# Altium PCB foc.PcbDoc
Units mm, origin at the board's own origin, x right, y up, seen from the top; angles counter-clockwise.
Board outline 89.54 x 51.18 mm, 2 copper layers (Top Layer, Bottom Layer); 143 components, 82 nets, 471 pads, 233 vias.
Unrouted connection lines stored in the file: 246.
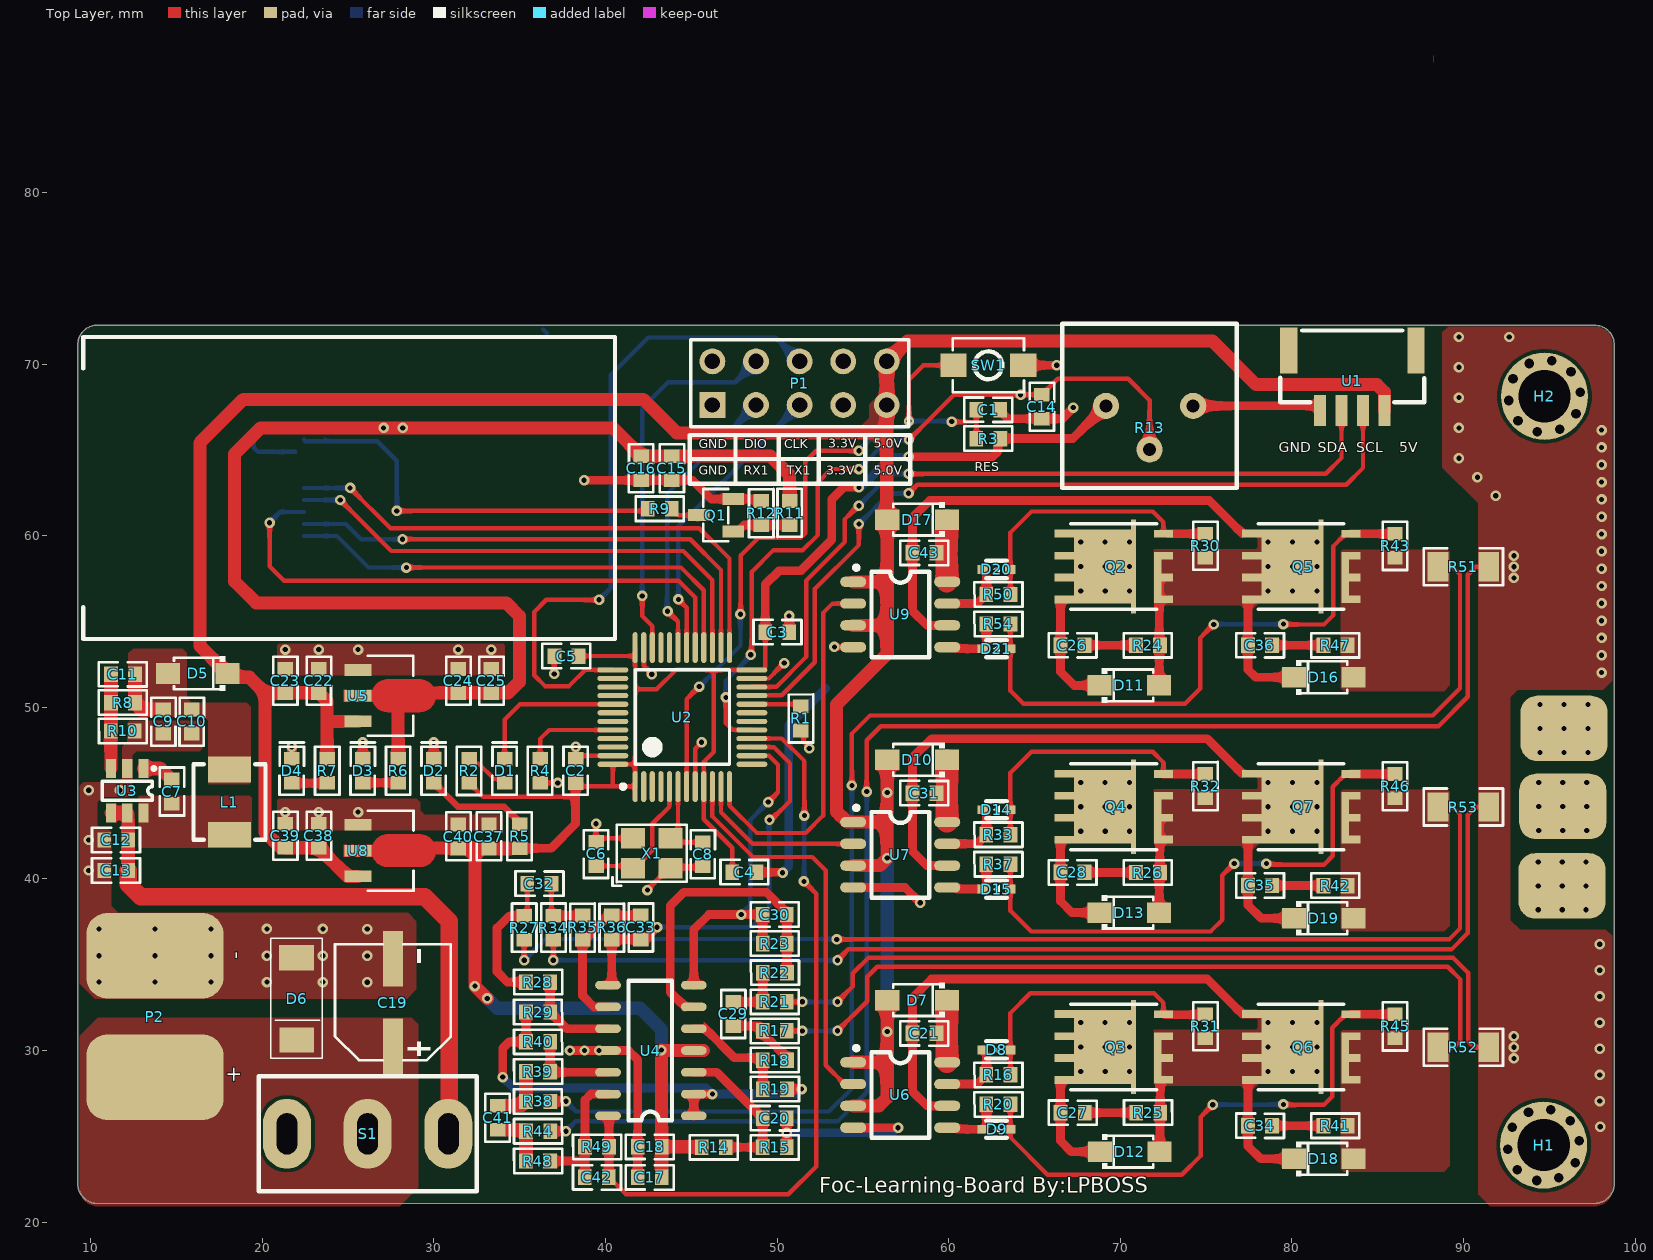
[diagram p0: Top Layer view]
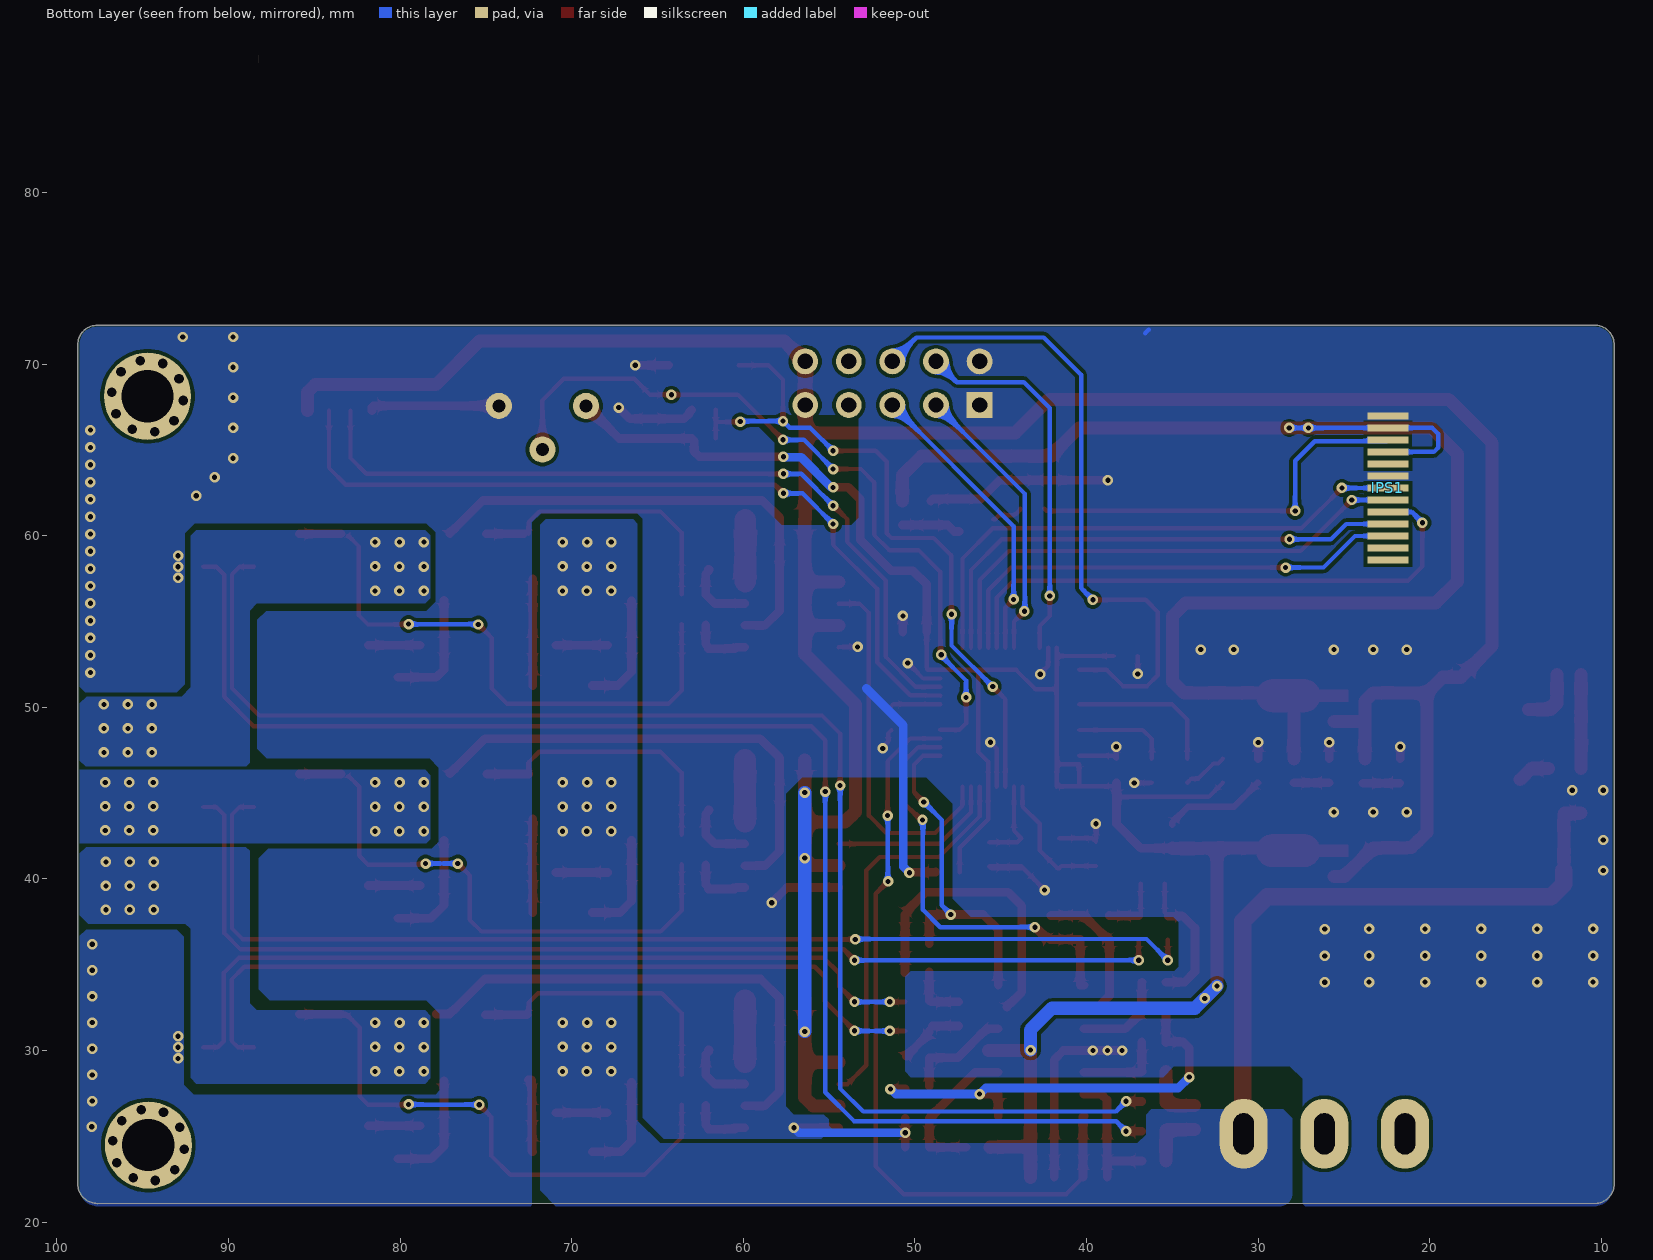
[diagram p1: Bottom Layer view, seen from below]

## Layer stack, top to bottom
Top Solder: solder mask 0.0102, Solder Resist, Dk 3.5
Top Layer: signal copper 0.0356
Dielectric 1: dielectric 0.32, FR-4, Dk 4.8
Bottom Layer: signal copper 0.0356
Bottom Solder: solder mask 0.0102, Solder Resist, Dk 3.5

## Board outline
10.239,21.092 cw(c10.39,22.226) 9.245,22.226 9.245,22.227 9.245,71.102 9.244,71.12 cw(c10.389,71.12) 10.389,72.265 10.406,72.263 97.635,72.263 97.636,72.263 cw(c97.636,71.119) 98.781,71.12 98.781,71.119 98.781,22.228 98.781,22.226 cw(c97.636,22.226) 97.636,21.082

## Design rules (kind name [scope] priority, off if disabled: settings)
Clearance [All] p1: gap=0.203 ignorepadtopadclearanceinfootprint=TRUE
ComponentClearance [All] p1: gap=0 collisioncheckmode=3 verticalgap=0 showdistances=FALSE
PlaneConnect [All] p1: planeconnectstyle=Direct reliefexpansion=0.508 reliefentries=4 reliefconductorwidth=0.254 reliefairgap=0.254
PolygonConnect [All] p1: connectstyle=Direct reliefconductorwidth=0.254 reliefentries=4 polygonreliefangle="90 Angle" airgapwidth=0.254
RoutingVias [All] p1: holewidth=0.711 width=1.27 viastyle="Through Hole" minholewidth=0.025 minwidth=0.025 maxholewidth=0.711 maxwidth=1.27
SolderMaskExpansion [All] p1: expansion=0.102 istentingtop=FALSE
Width [All] p1: maxlimit=2.54 minlimit=0.025 preferedwidth=0.254
28 further rules are at their usual default settings.

## Components (designator, comment, footprint, x,y, rotation, side; value= is the part's Value field where it differs from the comment)
C1 "104" C0603 62.306,67.335 r0 top
C2 "104" C0603 38.252,46.289 r270 top
C3 "104" C0603 50.013,54.381 r180 top
C4 "104" C0603 48.087,40.395 r180 top
C5 "104" C0603 37.719,52.984 r0 top
C6 "20P" C0603 39.446,41.453 r90 top
C7 "104" C0603 14.732,45.085 r270 top
C8 "20P" C0603 45.665,41.433 r270 top
C9 "22UF" C0603 14.238,49.171 r90 top
C10 "104" C0603 15.889,49.171 r90 top
C11 "220pf" C0603 11.877,51.919 r0 top
C12 "104" C0603 11.481,42.266 r0 top
C13 "22uf" C0603 11.481,40.488 r0 top
C14 "104" C0603 65.43,67.513 r90 top
C15 "10uf" C0603 43.866,63.935 r90 top
C16 "104" C0603 42.078,63.935 r90 top
C17 "10uF" C0603 42.569,22.608 r180 top
C18 "104" C0603 42.569,24.383 r180 top
C19 "470uf" CAP-SMD_BD6.3-L6.6-W6.6-LS7.2-R-RD 27.61,32.791 r270 top
C20 "104" C0603 49.86,26.055 r180 top
C21 "104" C0603 58.582,30.995 r0 top
C22 "10uf" C0603 23.292,51.536 r270 top
C23 "104" C0603 21.336,51.536 r270 top
C24 "10uf" C0603 31.42,51.536 r270 top
C25 "104" C0603 33.351,51.536 r270 top
C26 "104" C0603 67.208,53.614 r180 top
C27 "104" C0603 67.219,26.376 r180 top
C28 "104" C0603 67.208,40.376 r180 top
C29 "104" C0603 47.447,32.131 r90 top
C30 "104" C0603 49.86,37.922 r0 top
C31 "1uf" C0603 58.582,44.995 r0 top
C32 "104" C0603 36.144,39.726 r180 top
C33 "104" C0603 42.062,37.173 r90 top
C34 "104" C0603 78.133,25.614 r180 top
C35 "104" C0603 78.133,39.614 r180 top
C36 "104" C0603 78.133,53.614 r180 top
C37 "104" C0603 33.208,42.468 r270 top
C38 "104" C0603 23.297,42.507 r270 top
C39 "10uf" C0603 21.342,42.507 r270 top
C40 "10uf" C0603 31.425,42.468 r270 top
C41 "104" C0603 33.706,26.086 r90 top
C42 "104" C0603 39.494,22.608 r180 top
C43 "104" C0603 58.582,58.995 r0 top
D1 "LED" LED0603 34.123,46.304 r90 top
D2 "LED" LED0603 29.987,46.304 r90 top
D3 "LED" LED0603 25.852,46.304 r90 top
D4 "LED" LED0603 21.717,46.304 r90 top
D5 "Diode" SOD-123FL_L2.7-W1.8-LS3.8-RD 16.231,51.968 r180 top
D6 "TVS-7.4/12V" SMA 22.996,36.145 r270 top
D7 "Diode" SOD-123FL_L2.7-W1.8-LS3.8-RD 58.152,32.933 r180 top
D8 "Diode" ESC_L1.2-W0.8-LS1.6-RD 62.778,30.029 r0 top
D9 "Diode" ESC_L1.2-W0.8-LS1.6-RD 62.788,25.407 r0 top
D10 "Diode" SOD-123FL_L2.7-W1.8-LS3.8-RD 58.152,46.933 r180 top
D11 "Diode" SOD-123FL_L2.7-W1.8-LS3.8-RD 70.53,51.272 r0 top
D12 "Diode" SOD-123FL_L2.7-W1.8-LS3.8-RD 70.541,24.105 r0 top
D13 "Diode" SOD-123FL_L2.7-W1.8-LS3.8-RD 70.53,38.034 r0 top
D14 "Diode" ESC_L1.2-W0.8-LS1.6-RD 62.778,44.029 r0 top
D15 "Diode" ESC_L1.2-W0.8-LS1.6-RD 62.778,39.407 r0 top
D16 "Diode" SOD-123FL_L2.7-W1.8-LS3.8-RD 81.849,51.745 r0 top
D17 "Diode" SOD-123FL_L2.7-W1.8-LS3.8-RD 58.152,60.933 r180 top
D18 "Diode" SOD-123FL_L2.7-W1.8-LS3.8-RD 81.849,23.683 r0 top
D19 "Diode" SOD-123FL_L2.7-W1.8-LS3.8-RD 81.849,37.704 r0 top
D20 "Diode" ESC_L1.2-W0.8-LS1.6-RD 62.778,58.029 r0 top
D21 "Diode" ESC_L1.2-W0.8-LS1.6-RD 62.778,53.407 r0 top
H1 "Hole" 铜柱孔3 94.666,24.486 r0 top
H2 "Hole" 铜柱孔3 94.717,68.123 r0 top
IPS1 "IPS1.14" IPS 15.661,62.781 r0 top locked
L1 "3.3uH" "0402 TPC 4*4*2" 18.085,44.475 r270 top
P1 "Header 5X2" HDR2X5 46.228,67.615 r0 top
P2 "电源" POWER 13.741,31.979 r90 top
Q1 "44H11" SOT-23-3_L2.9-W1.3-P1.90-LS2.4-BR 46.431,61.19 r0 top
Q2 "N-MOS" TDSON-8 69.609,58.201 r90 top
Q3 "N-MOS" TDSON-8 69.609,30.201 r90 top
Q4 "N-MOS" TDSON-8 69.609,44.201 r90 top
Q5 "N-MOS" TDSON-8 80.534,58.201 r90 top
Q6 "N-MOS" TDSON-8 80.534,30.201 r90 top
Q7 "N-MOS" TDSON-8 80.534,44.201 r90 top
R1 "10K" R0603 51.384,49.352 r90 top
R2 "10K" R0603 32.05,46.296 r90 top
R3 "10K" R0603 62.298,65.659 r180 top
R4 "10K" R0603 36.185,46.296 r270 top
R5 "10K" R0603 34.996,42.483 r90 top
R6 "10K" R0603 27.914,46.296 r270 top
R7 "10K" R0603 23.779,46.296 r270 top
R8 "73.2K" R0603 11.877,50.265 r0 top
R9 "24R" R0603 43.154,61.57 r180 top
R10 "10K" R0603 11.869,48.617 r180 top
R11 "1k" R0603 50.728,61.32 r270 top
R12 "10k" R0603 49.077,61.32 r90 top
R13 "WH160-1-503(B50K)" 滑动变阻器 71.704,66.294 r0 top
R14 "5.1K" R0603 46.304,24.359 r180 top
R15 "5.1K" R0603 49.86,24.359 r180 top
R16 "10" R0603 62.892,28.573 r180 top
R17 "1K" R0603 49.86,31.138 r0 top
R18 "1K" R0603 49.869,29.442 r0 top
R19 "15K" R0603 49.869,27.751 r180 top
R20 "10" R0603 62.892,26.854 r180 top
R21 "1K" R0603 49.86,32.834 r0 top
R22 "1K" R0603 49.869,34.535 r180 top
R23 "15K" R0603 49.86,36.226 r0 top
R24 "10" R0603 71.608,53.608 r0 top
R25 "10" R0603 71.619,26.376 r0 top
R26 "10" R0603 71.608,40.37 r0 top
R27 "1K" R0603 35.259,37.157 r270 top
R28 "1K" R0603 36.062,33.984 r180 top
R29 "15K" R0603 36.071,32.24 r0 top
R30 "10K" R0603 74.957,59.411 r90 top
R31 "10K" R0603 74.957,31.411 r90 top
R32 "10K" R0603 74.957,45.411 r90 top
R33 "10" R0603 62.892,42.573 r180 top
R34 "1K" R0603 36.958,37.157 r270 top
R35 "1K" R0603 38.663,37.166 r90 top
R36 "15K" R0603 40.363,37.166 r90 top
R37 "10" R0603 62.892,40.854 r180 top
R38 "1K" R0603 36.071,27.027 r0 top
R39 "1K" R0603 36.062,28.77 r180 top
R40 "15K" R0603 36.071,30.503 r0 top
R41 "10" R0603 82.533,25.608 r0 top
R42 "10" R0603 82.533,39.608 r0 top
R43 "10K" R0603 86.006,59.406 r90 top
R44 "1K" R0603 36.071,25.29 r0 top
R45 "10K" R0603 86.006,31.406 r90 top
R46 "10K" R0603 86.006,45.406 r90 top
R47 "10" R0603 82.533,53.608 r0 top
R48 "1K" R0603 36.062,23.557 r180 top
R49 "15K" R0603 39.501,24.383 r180 top
R50 "10" R0603 62.892,56.573 r180 top
R51 "20mR" R1206 89.989,58.186 r180 top
R52 "20mR" R1206 89.989,30.186 r180 top
R53 "20mR" R1206 89.989,44.186 r180 top
R54 "10" R0603 62.892,54.854 r180 top
S1 "MTS-10x" SW-TH_HOOYA_SS-12D10G4 26.137,25.146 r180 top
SW1 "Switch" SW-SMD_L4.0-W2.9-LS5.0 62.306,69.926 r180 top
U1 "GH125-4P" CONN-SMD_4P-P1.27_GH125-S04DCA-00 83.515,69.037 r180 top
U2 "STM32F103C8T6" 48P 44.475,49.428 r90 top
U3 "RY8121" SOT-23-6 12.127,45.131 r270 top
U4 "MCP6024" SOP14_L 42.647,29.997 r180 top
U5 "AMS1117" SOT-89_L4.5-W2.5-P1.50-LS4.2-BR 26.932,50.672 r180 top
U6 "EG2104" SOP-8 57.172,27.407 r270 top
U7 "EG2104" SOP-8 57.172,41.407 r270 top
U8 "AMS1117" SOT-89_L4.5-W2.5-P1.50-LS4.2-BR 26.938,41.643 r180 top
U9 "EG2104" SOP-8 57.172,55.407 r270 top
X1 "XTAL-4" OSC-SMD_4P-L3.2-W2.5-BL 42.693,41.498 r0 top

## Footprints (in the part's own frame and the unit in brackets; to place one, negate y for a bottom-side part, rotate by r counter-clockwise, add the part's x,y. Pads: shape width x height; smd on the part's side, far side on the other; paste and mask are expansions set on the pad)
48P [mm] "stm32f103"
  oval 1.8x0.3 smd: 1(-4.05,2.75) 2(-4.05,2.25) 3(-4.05,1.75) 4(-4.05,1.25) 5(-4.05,0.75) 6(-4.05,0.25) 7(-4.05,-0.25) 8(-4.05,-0.75) 9(-4.05,-1.25) 10(-4.05,-1.75) 11(-4.05,-2.25) 12(-4.05,-2.75) 25(4.05,-2.75) 26(4.05,-2.25) 27(4.05,-1.75) 28(4.05,-1.25) 29(4.05,-0.75) 30(4.05,-0.25) 31(4.05,0.25) 32(4.05,0.75) 33(4.05,1.25) 34(4.05,1.75) 35(4.05,2.25) 36(4.05,2.75)
  oval 0.3x1.8 smd: 13(-2.75,-4.05) 14(-2.25,-4.05) 15(-1.75,-4.05) 16(-1.25,-4.05) 17(-0.75,-4.05) 18(-0.25,-4.05) 19(0.25,-4.05) 20(0.75,-4.05) 21(1.25,-4.05) 22(1.75,-4.05) 23(2.25,-4.05) 24(2.75,-4.05) 37(2.75,4.05) 38(2.25,4.05) 39(1.75,4.05) 40(1.25,4.05) 41(0.75,4.05) 42(0.25,4.05) 43(-0.25,4.05) 44(-0.75,4.05) 45(-1.25,4.05) 46(-1.75,4.05) 47(-2.25,4.05) 48(-2.75,4.05)
  silkscreen extent -4.17,-2.75 2.75,3.57
"0402 TPC 4*4*2" [mm] "4.2mm x 4.4mm x 2mm 一体成型功率电感"
  rect 1.5x2.5 smd: 1(-1.9,0) 2(1.9,0)
  silkscreen extent -2.2,-2.1 2.2,2.1
C0603 [mm]
  rect 0.8x0.9 smd mask+0.051: 1(-0.7,0) 2(0.7,0)
  silkscreen extent -1.41,-0.71 1.39,0.72
CAP-SMD_BD6.3-L6.6-W6.6-LS7.2-R-RD [mm]
  rect 3.26x1.15 smd mask+0.051: 1(2.555,0) 2(-2.555,0)
  silkscreen extent -3.39,-3.38 3.36,3.38
CONN-SMD_4P-P1.27_GH125-S04DCA-00 [mm] "P4"
  rect 0.7x1.8 smd mask+0.05: 1(-1.875,1.75) 2(-0.625,1.75) 3(0.625,1.75) 4(1.875,1.75)
  rect 1x2.7 smd mask+0.05: 5(3.705,-1.75) 6(-3.705,-1.75)
  silkscreen extent -4.19,-2.92 4.19,1.27
ESC_L1.2-W0.8-LS1.6-RD [mil]
  rect 23.6x19.7 smd mask+2: 1(-31.5,0) 2(31.5,0)
  silkscreen extent -24,-20 24,20
HDR2X5 [mm] "Connector; Header; 5x2 Position"
  rect 1.5x1.5 hole 0.9: 1(0,0)
  round 1.5 hole 0.9: 2(0,2.54) 3(2.54,0) 4(2.54,2.54) 5(5.08,0) 6(5.08,2.54) 7(7.62,0) 8(7.62,2.54) 9(10.16,0) 10(10.16,2.54)
  silkscreen extent -1.27,-1.27 11.43,3.81
IPS [mm]
  rect 2.4x0.4 smd far side: 1(6.767,-4.2) 2(6.767,-3.5) 3(6.767,-2.8) 4(6.767,-2.1) 5(6.767,-1.4) 6(6.767,-0.7) 7(6.767,0) 8(6.767,0.7) 9(6.767,1.4) 10(6.767,2.1) 11(6.767,2.8) 12(6.767,3.5) 13(6.767,4.2)
  silkscreen extent -6.11,-8.8 24.89,8.8
LED0603 [mm]
  rect 0.8x0.9 smd mask+0.051: A(-0.7,0) N(0.7,0)
  silkscreen extent -1.41,-0.71 1.64,0.72
OSC-SMD_4P-L3.2-W2.5-BL [mm] "贴片晶振"
  rect 1.4x1.2 smd: 1(-1.1,-0.875) 2(1.1,-0.875) 3(1.1,0.875) 4(-1.1,0.875)
  silkscreen extent -2.29,-1.9 2.03,1.65
POWER [mm]
  rrect50% 5x8 smd: 1(-3.541,-0.001) 2(3.541,0.001)
R0603 [mm]
  rect 0.8x0.9 smd mask+0.051: 1(-0.7,0) 2(0.7,0)
  silkscreen extent -1.41,-0.71 1.4,0.72
R1206 [mm]
  rect 1.208x1.701 smd paste-100 mask+0.051: 1(-1.479,0) 2(1.479,0)
  silkscreen extent -2.31,-1.08 2.31,1.08
SMA [mm]
  rect 1.47x2.02 smd: A(0.74,-1.01) N(5.53,-1)
  silkscreen extent -0.4,-2.5 6.6,0.5
SOD-123FL_L2.7-W1.8-LS3.8-RD [mm]
  rect 1.4x1.2 smd: 1(-1.735,0) 2(1.735,0)
  silkscreen extent -1.6,-1 1.38,1
SOP14_L [mm] "8.7*6.2*1.8mm（长宽高）"
  oval 1.5x0.5 smd: 1(-2.5,3.81) 2(-2.5,2.54) 3(-2.5,1.27) 4(-2.5,0) 5(-2.5,-1.27) 6(-2.5,-2.54) 7(-2.5,-3.81) 8(2.5,-3.81) 9(2.5,-2.54) 10(2.5,-1.27) 11(2.5,0) 12(2.5,1.27) 13(2.5,2.54) 14(2.5,3.81)
  silkscreen extent -1.23,-4.06 1.31,4.06
SOP-8 [mm]
  oval 0.6x1.52 smd mask+0.051: 1(-1.905,-2.74) 2(-0.635,-2.74) 3(0.635,-2.74) 4(1.905,-2.74) 5(1.905,2.74) 6(0.635,2.74) 7(-0.635,2.74) 8(-1.905,2.74)
  silkscreen extent -2.85,-2.68 2.5,1.7
SOT-23-3_L2.9-W1.3-P1.90-LS2.4-BR [mm]
  rect 1.25x0.7 smd mask+0.051: 1(1,-0.95) 2(1,0.95) 3(-1,0)
  silkscreen extent -0.73,-1.53 0.73,1.53
SOT-23-6 [mm] "SOT23, 6-Leads, Body 2.90x2.80mm, Pitch 0.95mm, IPC Medium Density"
  rect 1.1x0.6 smd: 1(-1.3,0.95) 2(-1.3,0) 3(-1.3,-0.95) 4(1.3,-0.95) 5(1.3,0) 6(1.3,0.95)
  silkscreen extent -1.37,-1.45 0.55,1.63
SOT-89_L4.5-W2.5-P1.50-LS4.2-BR [mm]
  rect 1.575x0.672 smd paste+0 mask+0.051: 1(1.356,-1.5) 2(1.356,0) 3(1.356,1.5)
  Top Layer region: -2.233,0.95 -0.378,0.95 -0.334,0.949 -0.289,0.946 -0.245,0.94 -0.201,0.933 -0.158,0.924 -0.115,0.912 -0.072,0.899 -0.03,0.884 0.011,0.866 0.051,0.847 0.09,0.826 0.128,0.803 0.166,0.779 0.201,0.752 0.236,0.724 0.269,0.695 0.301,0.664 0.332,0.631 0.36,0.597 0.388,0.562 0.413,0.525 0.437,0.488 0.459,0.449 0.479,0.409 0.491,0.356 2.195,0.356 2.195,-0.356 0.491,-0.356 0.479,-0.41 0.459,-0.449 0.437,-0.488 0.413,-0.526 0.388,-0.562 0.36,-0.598 0.332,-0.631 0.301,-0.664 0.269,-0.695 0.236,-0.725 0.201,-0.753 0.166,-0.779 0.128,-0.804 0.09,-0.827 0.051,-0.848 0.011,-0.867 -0.03,-0.884 -0.072,-0.9 -0.115,-0.913 -0.158,-0.924 -0.201,-0.934 -0.245,-0.941 -0.289,-0.946 -0.334,-0.949 -0.378,-0.95 -2.233,-0.95 -2.277,-0.949 -2.321,-0.946 -2.366,-0.941 -2.41,-0.934 -2.453,-0.924 -2.496,-0.913 -2.539,-0.9 -2.581,-0.884 -2.622,-0.867 -2.662,-0.848 -2.701,-0.827 -2.739,-0.804 -2.776,-0.779 -2.812,-0.753 -2.847,-0.725 -2.88,-0.695 -2.912,-0.664 -2.942,-0.631 -2.971,-0.598 -2.998,-0.562 -3.024,-0.526 -3.048,-0.488 -3.07,-0.449 -3.09,-0.41 -3.108,-0.369 -3.124,-0.327 -3.139,-0.285 -3.151,-0.243 -3.161,-0.199 -3.17,-0.155 -3.176,-0.111 -3.18,-0.067 -3.182,-0.023 -3.182,0.022 -3.18,0.067 -3.176,0.111 -3.17,0.155 -3.161,0.199 -3.151,0.242 -3.139,0.285 -3.124,0.327 -3.108,0.368 -3.09,0.409 -3.07,0.449 -3.048,0.488 -3.024,0.525 -2.998,0.562 -2.971,0.597 -2.942,0.631 -2.912,0.664 -2.88,0.695 -2.847,0.724 -2.812,0.752 -2.776,0.779 -2.739,0.803 -2.701,0.826 -2.662,0.847 -2.622,0.866 -2.581,0.884 -2.539,0.899 -2.496,0.912 -2.453,0.924 -2.41,0.933 -2.366,0.94 -2.321,0.946 -2.277,0.949
  silkscreen extent -1.87,-2.33 0.78,2.33
SW-SMD_L4.0-W2.9-LS5.0 [mm]
  rect 1.53x1.36 smd mask+0.051: 1(-2.035,0) 2(2.035,0)
  silkscreen extent -2.08,-1.58 2.08,1.58
SW-TH_HOOYA_SS-12D10G4 [mil] "拨动开关"
  oval 110x160 hole 47.24 slot 94.49 at 90 deg: 1(-185.04,0) 2(0,0) 3(185.04,0)
  silkscreen extent -250,-132 250,132
TDSON-8 [mm]
  rect 0.45x1.6 smd: 1(-1.925,2.65) 1(-0.635,2.65) 1(0.635,2.65) 1(1.925,2.65)
  rect 5.5x0.3 smd: 1(0,-1.158)
  rect 4.3x3.605 smd: 1(0,0.495)
  rect 0.45x1.1 smd: 2(1.905,-2.9) 3(-1.905,-2.9) 3(-0.635,-2.9) 3(0.635,-2.9)
  rect 2.99x0.45 smd: 3(-0.635,-2.575)
  silkscreen extent -2.5,-2.5 2.5,2.5
滑动变阻器 [mil]
  round 60 hole 30: 1(-100,50) 2(0,-50) 3(100,50)
  silkscreen extent -200,-139 200,239
铜柱孔3 [mil]
  round 23 hole 22: 11(-82.21,-9.67) 11(-72.19,40.5) 11(-60.83,-56.14) 11(-34.6,75.2) 11(-16.21,-81.17) 11(16.21,81.17) 11(34.6,-75.2) 11(60.83,56.14) 11(72.19,-40.5) 11(82.21,9.67)
  round 200 hole 120: 11(0,0)

## Part data
C1 C2 C3 C4 C5 C6 C7 C8 C9 C10 C11 C12 C13 C14 C15 C16 C17 C18 C20 C21 C22 C23 C24 C25 C26 C27 C28 C29 C30 C31 C32 C33 C34 C35 C36 C37 C38 C39 C40 C41 C42 C43: library part C, "无极性电容", BOM名称=无极性贴片电容, 学习资源=www.ooocke.com, 版权归属=源创客
C19: library part CAP+, "电解电容 10uf  贴片型 钽电容的正极是实物有线的一段", BOM_JLCPCB Part Class="Extended Part", BOM_Manufacturer=ROQANG, BOM_Manufacturer Part=RVT1V100M0405, BOM_Supplier=LCSC, BOM_Supplier Part=C72485, nameAlias=Capacitance, spicePre=C, spiceSymbolName=RVT1V100M0405-C72485
D5 D7 D8 D9 D10 D11 D12 D13 D14 D15 D16 D17 D18 D19 D20 D21: library part 二极管, "Diode 1N series"
H1 H2: "电机的洞"
L1: library part L, "电感", BOM名称=小功率贴片电感, 学习资源=www.ooocke.com, 版权归属=源创客
P1: "Header, 5-Pin, Dual row", LatestRevisionDate=17-Jul-2002, LatestRevisionNote="Re-released for DXP Platform.", Publisher="Altium Limited"
P2: library part power
Q1: library part NPN, "NPN型", BOM名称=互补功率-NPN型, 学习资源=www.ooocke.com, 属性="80V 8A 50W", 版权归属=源创客
Q2 Q3 Q4 Q5 Q6 Q7: "N沟场效应管", BOM名称=N沟场效应管, 学习资源=www.ooocke.com, 版权归属=源创客
R1 R2 R3 R4 R5 R6 R7 R8 R9 R10 R11 R12 R14 R15 R16 R17 R18 R19 R20 R21 R22 R23 R24 R25 R26 R27 R28 R29 R30 R31 R32 R33 R34 R35 R36 R37 R38 R39 R40 R41 R42 R43 R44 R45 R46 R47 R48 R49 R50 R51 R52 R53 R54: library part R, "电阻", BOM名称=贴片电阻, 学习资源=www.ooocke.com, 版权归属=源创客
R13: "拨码开关", Manufacturer=JML, Manufacturer Part=WH160-1-503(B50K), nameAlias=Value, spicePre=R, spiceSymbolName=B503，可变电阻, Supplier=LCSC, Supplier Part=C52954
S1: "MTS10x系列3脚扭子开关", BOM名称=MTS10x系列3脚扭子开关, 学习资源=www.ooocke.com, 版权归属=源创客
SW1: "SWITCH"
U3: "18V 2A 1MHz Synchronous Step-Down Regulator"
X1: "贴片晶振"

## Free pads (board coordinates)
  rrect50% 5.08x3.81 smd mask+0.051: 7(95.746,39.591) 7(95.783,44.221) 7(95.86,48.768)

## Via types
v1: diameter 0.61, hole 0.305, Top Layer to Bottom Layer, tented both sides, 233 vias

## Nets (pads, with @x,y where several pads share a name; then routed paths per layer and width w, separated by ;. In a path a pad name is that pad's centre, name@x,y a point inside that pad or via, vN(x,y) a via of type N, cw(c..) or ccw(c..) an arc to the next point about the centre after c; other vN are vias at no path point)
1.65V: R19.1 R29.1 R40.1 U4.1 U4.2 | length 26.1
  Top Layer w0.508: v1(34.011,28.448) 34.011,30.124 34.389,30.503 R40.1 ; R40.1@35.371,30.453 R29.1 ; U4.1 U4.2 v1(46.228,27.457) ; R19.1 v1(51.424,27.751)
  Bottom Layer w0.508: v1(34.011,28.448) 34.646,27.813 45.872,27.813 46.22,27.465 46.22,27.457 51.103,27.457 51.396,27.751 v1(51.424,27.751)
3.3V: C2.2 C3.2 C4.2 C5.2 C17.1 C18.1 C37.2 C40.2 R2.1 R3.1 R5.1 R13.1 R14.2 U2.1 U2.9 U2.24 U2.36 U2.48 U4.4 U8.2 | length 122.5
  Top Layer w0.254: R2.1 32.865,44.78 38.252,44.78 ; C2.2@38.252,45.63 38.492,45.39 40.488,45.39 ; C5.2 U2.36@41.725,52.984 ; U2.1 U2.1@41.725,45.39 ; U2.36 U2.36@41.725,52.984 ; C4.2 47.387,41.818 45.725,43.479 U2.9 45.725,46.818 46.304,47.396 46.304,52.178 ; C3.2 49.313,52.35 49.284,52.322 49.284,52.2 49.263,52.178 46.304,52.178 ; 40.488,45.39 40.425,45.452 U2.48 41.725,46.678 ; 40.488,45.39 U2.1@41.725,45.39 ; U2.1@41.725,45.39 41.725,46.678 ; 41.725,46.678 41.725,51.054 ; 41.725,51.054 U2.36@41.725,52.984 ; 41.725,51.054 42.977,51.054 44.101,52.178 46.304,52.178
  Top Layer w0.508: R5.1 36.83,41.783 38.252,43.205 38.252,44.78 38.252,45.39 C2.2 ; C3.2 49.313,57.161 50.114,57.963 51.384,57.963 53.188,59.766 53.188,62.128 53.873,62.814 v1(54.762,62.814) ; v1(57.658,64.601) 62.554,64.601 62.852,64.898 62.852,65.513 R3.1 63.195,65.659 67.229,65.659 69.134,67.564 R13.1
  Top Layer w0.762: 28.88,41.783 28.904,41.807 31.425,41.807 32.391,41.807 ; v1(33.112,33.03) v1(32.391,33.751) 32.391,41.807 ; C37.2@33.185,41.807 32.391,41.807 ; C37.2 34.981,41.768 R5.1 ; v1(43.256,30.023) v1@43.269,30.01 ; C17.1 C18.1 ; R14.2 45.579,24.383 C18.1 ; U4.4@45.695,29.997 43.282,29.997 v1@43.269,30.01 ; C18.1 v1@43.269,30.01
  Bottom Layer w0.508: v1(54.762,62.814) 54.782,62.834 54.895,62.834 56.629,64.567 57.552,64.567 57.567,64.581 57.644,64.581 v1@57.658,64.567
  Bottom Layer w0.762: v1(32.391,33.751) 33.68,32.461 42.012,32.461 43.269,31.204 43.269,30.036 v1(43.256,30.023)
3.3V_ips: C15.2 C16.2 C24.2 C25.2 IPS1.10 IPS1.12 R6.1 R11.1 U5.2 | length 86.8
  Top Layer w0.762: R6.1 27.914,50.317 28.219,50.622 ; 28.778,50.648 28.967,50.836 C24.2 C25.2 34.326,50.836 34.976,51.486 34.976,55.321 34.214,56.083 19.634,56.083 18.39,57.328 18.39,64.77 19.9,66.281 v1(27.064,66.281) v1(28.182,66.281) 40.433,66.281 42.009,64.704 42.009,64.654 42.028,64.635 C15.2 49.614,64.635 50.728,63.521 R11.1
  Bottom Layer w0.254: IPS1.10@21.92,64.881 19.752,64.881 19.507,65.126 19.507,65.938 19.849,66.281 IPS1.12 v1(27.064,66.281) v1(28.182,66.281)
5V: C22.2 C23.2 C38.2 C39.2 D5.1 D7.2 D10.2 D17.2 P1.9 P1.10 R7.1 U1.1 U5.3 U6.1 U6.3 U7.1 U7.3 U8.3 U9.1 U9.3 | length 180.4
  Top Layer w0.762: R7.1 23.779,49.154 ; 23.798,49.172 23.779,49.154 ; 23.825,49.172 U5.3 ; U8.3 24.961,40.143 C38.2 C39.2 21.323,41.826 21.07,41.826 20.673,42.223 20.65,42.223 20.165,42.707 20.165,50.825 ; U6.3 55.931,26.772 56.417,27.258 56.417,29.312 ; U6.1 56.417,29.312 ; U7.3 55.978,40.772 v1@56.415,41.209 ; U9.3 56.417,54.772 ; U9.1 56.417,57.312 ; D17.2@56.388,60.962 56.388,65.989 ; v1(56.413,41.211) 56.413,43.312 ; v1(56.413,45.026) 56.413,43.312 ; D7.2@56.417,33.029 D7.2 v1(56.417,31.1) 56.417,29.312 ; v1@56.417,45.026 D10.2 ; D17.2 56.417,57.312 ; U1.1 85.39,68.362 84.944,68.809 77.902,68.809 75.362,71.349 57.61,71.349 56.416,70.155 P1.10 P1.9 56.388,65.989 ; 20.165,50.825 22.035,50.825 22.046,50.836 C22.2 23.779,50.349 23.779,49.154 ; 20.165,50.825 19.241,51.749 18.185,51.749 16.358,53.576 16.358,65.405 18.898,67.945 42.189,67.945 44.145,65.989 56.388,65.989 ; 56.413,43.312 U7.1 54.066,43.312 53.467,43.91 53.467,50.165 56.417,53.115 56.417,54.772 ; 56.417,54.772 56.417,57.312
  Bottom Layer w0.762: v1(56.417,31.1) 56.417,32.933 v1@56.417,45.026
12V: C12.2 C13.2 C26.2 C27.2 C28.2 D11.1 D12.1 D13.1 Q2.1 Q3.1 Q4.1 S1.1 U3.4 U3.5 | length 55.9
  Top Layer w0.508: Q3.1@66.508,28.154 66.508,26.386 C27.2 66.508,26.365 66.508,24.741 67.145,24.105 D12.1 ; Q4.1@66.508,42.247 C28.2 66.508,38.711 67.185,38.034 D13.1 ; Q2.1@66.508,56.195 C26.2 66.508,52.072 67.307,51.272 D11.1
  Top Layer w0.762: U3.4 U3.5 ; C13.2 C12.2 U3.5@12.181,43.778
  Top Layer w1.016: C13.2 12.181,39.686 12.903,38.964 29.464,38.964 30.886,37.541 30.886,25.196 S1.1
  other v1: 67.686,28.778 69.113,28.778 70.531,28.778 67.686,30.196 69.109,30.201 70.531,30.205 67.686,31.623 69.104,31.623 70.531,31.623 67.686,42.778 69.113,42.778 70.531,42.778 67.686,44.196 69.109,44.201 70.531,44.205 67.686,45.623 69.104,45.623 70.531,45.623 67.686,56.778 69.113,56.778 70.531,56.778 67.686,58.196 69.109,58.201 70.531,58.205 67.686,59.623 69.104,59.623 70.531,59.623
A: C21.1 C34.2 D12.2 D18.1 pad.7@95.746,39.591 Q3.3 Q6.1 R25.2 R31.1 U6.6 | length 40.3
  Top Layer w0.508: U6.6 58.737,26.772 57.882,27.627 C21.1 57.882,33.049 58.996,34.163 75.069,34.163 77.107,32.126 Q6.1@77.884,32.126 ; D12.2 72.308,24.137 72.308,26.365 R25.2 72.319,28.267 72.348,28.296 Q3.3@72.509,28.296 ; Q6.1@77.433,28.23 77.433,24.433 78.183,23.683 D18.1
  other v1: 78.611,28.778 80.038,28.778 81.456,28.778 78.611,30.196 80.034,30.201 81.456,30.205 78.611,31.623 80.029,31.623 81.456,31.623 94.349,38.194 95.746,38.194 97.143,38.194 94.349,39.591 95.746,39.591 97.143,39.591 94.349,40.988 95.746,40.988 97.143,40.988
B: C31.1 C35.2 D13.2 D19.1 pad.7@95.783,44.221 Q4.3 Q7.1 R26.2 R32.1 U7.6 | length 40.6
  Top Layer w0.508: U7.6 58.737,40.772 57.882,41.627 C31.1 57.882,47.049 59.006,48.173 75.059,48.173 Q7.1@77.107,46.126 ; D13.2 72.265,40.327 R26.2 72.294,40.384 72.294,42.267 72.265,42.296 Q4.3@72.265,43.484 ; Q7.1@77.433,42.23 C35.2 77.433,38.48 78.209,37.704 D19.1
  other v1: 78.611,42.778 80.038,42.778 81.456,42.778 94.386,42.824 95.783,42.824 97.18,42.824 78.611,44.196 80.034,44.201 81.456,44.205 94.386,44.221 95.783,44.221 97.18,44.221 78.611,45.623 80.029,45.623 81.456,45.623 94.386,45.618 95.783,45.618 97.18,45.618
BOOT0: R4.1 U2.44 | length 5.6
  Top Layer w0.254: R4.1 36.185,48.148 36.715,48.678 U2.44
BOOT1: R1.2 U2.20 | length 2.9
  Top Layer w0.254: U2.20 51.258,50.178 R1.2
C: C36.2 C43.1 D11.2 D16.1 pad.7@95.86,48.768 Q2.3 Q5.1 R24.2 R30.1 U9.6 | length 41.4
  Top Layer w0.508: U9.6 58.737,54.772 57.882,55.627 C43.1 57.882,61.049 58.885,62.052 75.18,62.052 Q5.1@77.107,60.126 ; D11.2 Q2.3@72.265,57.484 ; Q5.1@77.433,56.23 77.433,52.196 77.883,51.745 D16.1
  other v1: 94.463,47.371 95.86,47.371 97.257,47.371 94.463,48.768 95.86,48.768 97.257,48.768 94.463,50.165 95.86,50.165 97.257,50.165 78.611,56.778 80.038,56.778 81.456,56.778 78.611,58.196 80.034,58.201 81.456,58.205 78.611,59.623 80.029,59.623 81.456,59.623
DC: IPS1.5 U2.29 | length 33.3
  Top Layer w0.254: v1(20.422,60.757) 20.422,58.217 21.26,57.379 44.247,57.379 45.225,56.4 U2.29
  Bottom Layer w0.254: v1(20.422,60.757) 21.045,61.381 IPS1.5
GND: C1.2 C2.1 C3.1 C4.1 C5.1 C6.2 C8.2 C9.1 C10.1 C12.1 C13.1 C14.1 C15.1 C16.1 C17.2 C18.2 C19.2 C20.1 C22.1 C23.1 C24.1 C25.1 C37.1 C38.1 C39.1 C40.1 D2.N D3.N D4.N D6.A IPS1.8 IPS1.13 P1.1 P1.2 P2.2 Q1.2 R1.1 R4.2 R10.1 R12.2 R13.3 R15.1 R21.2 R34.2 R44.2 R51.1 R52.1 R53.1 SW1.1 U1.4 U2.8 U2.23 U2.35 U2.47 U3.2 U4.11 U5.1 U6.4 U7.4 U8.1 U9.4 X1.2 X1.4 | length 286.6
  Top Layer w0.254: R4.2 36.188,45.593 v1(37.211,45.593) ; v1(36.957,35.255) R34.2 ; v1(37.008,51.943) 37.008,52.973 C5.1 ; C2.1 C2.1@38.258,46.994 ; v1(38.258,47.694) C2.1@38.258,46.994 ; v1(39.446,43.205) C6.2 39.666,42.373 X1.4 ; U2.47 38.442,47.178 C2.1@38.258,46.994 ; U2.35 42.234,53.47 42.234,52.424 42.697,51.961 v1(42.697,51.918) ; v1(42.443,39.345) 42.443,39.373 43.803,40.733 C8.2 45.556,40.623 X1.2 ; U2.8 45.225,47.588 v1(45.593,47.955) ; U2.23 49.519,51.678 v1(50.419,52.578) ; R21.2 v1(51.46,32.834) ; R1.1 51.543,48.494 51.543,48.02 51.867,47.696 v1(51.867,47.6) ; v1(53.34,53.518) 53.348,53.51 54.424,53.51 U9.4 ; v1(53.518,32.842) 54.407,33.731 54.407,34.493 55.321,35.408 89.383,35.408 90.272,34.519 90.272,30.531 90.617,30.186 R52.1 ; v1(53.518,35.264) 54.144,35.89 55.605,35.89 89.298,35.89 90.248,36.84 90.248,43.724 90.71,44.186 R53.1 ; v1(55.22,45.085) 55.22,48.082 56.032,48.895 88.536,48.895 90.248,50.607 90.248,57.724 90.71,58.186 R51.1
  Top Layer w0.508: D4.N v1(21.717,47.694) ; D3.N v1(25.852,47.948) ; D2.N v1(29.988,47.948) ; R44.2 37.685,25.29 v1(37.694,25.298) ; v1(36.957,35.255) v1(36.957,35.255) ; v1@37.922,29.972 37.95,29.972 37.975,29.997 41.337,29.997 41.869,29.465 C18.2 C17.2 ; v1(38.749,63.235) C16.1 45.071,63.235 46.165,62.14 48.956,62.14 R12.2 ; C4.1 48.804,40.378 50.3,40.378 v1(50.317,40.361) ; R15.1 v1(50.56,25.207) C20.1 ; v1(50.698,55.321) 50.706,55.314 50.706,54.389 C3.1 ; U6.4 v1(57.048,25.502) ; U7.4 57.45,39.502 v1(58.344,38.608) ; C1.2 63.152,67.189 63.152,67.111 63.45,66.813 C14.1 66.61,66.813 v1(67.259,67.462) ; SW1.1 v1(66.294,69.926) ; R13.3 81.544,67.564 81.64,67.468 U1.4
  Bottom Layer w0.254: 36.373,72.009 36.576,71.806 ; v1(36.957,35.255) v1@53.518,35.255 ; v1(37.694,25.298) 38.278,25.883 53.543,25.883 55.22,27.559 v1(55.22,45.085) ; v1(51.46,32.834) v1@53.518,32.834
  Bottom Layer w0.508: v1(50.317,40.361) 50.673,40.716 50.673,48.946 52.831,51.104 ; v1(50.56,25.207) 56.753,25.207 v1(57.048,25.502)
  other v1: 97.968,25.552 97.942,27.051 97.942,28.575 92.939,29.538 37.922,29.997 38.773,29.997 39.624,29.997 97.942,30.099 92.939,30.186 92.939,30.833 97.942,31.623 97.942,33.147 10.476,33.985 13.74,33.985 17.004,33.985 20.269,33.985 23.533,33.985 26.111,33.975 97.942,34.671 10.476,35.519 13.74,35.519 17.004,35.519 20.269,35.519 23.533,35.519 26.111,35.509 97.942,36.195 10.476,37.084 13.74,37.084 17.004,37.084 20.269,37.084 23.533,37.084 26.111,37.074 9.881,40.488 9.881,42.266 21.336,43.891 23.292,43.891 25.581,43.891 9.881,45.161 11.684,45.161 98.044,52.019 98.044,53.029 21.331,53.365 23.287,53.365 25.576,53.365 31.415,53.365 33.345,53.365 98.044,54.038 98.044,55.048 98.044,56.057 98.044,57.067 92.939,57.538 98.044,58.076 92.939,58.186 92.939,58.833 98.044,59.085 98.044,60.095 98.044,61.104 98.044,62.114 91.882,62.321 98.044,63.123 90.805,63.398 98.044,64.133 89.728,64.516 98.044,65.142 98.044,66.152 89.728,66.281 89.728,68.047 89.728,69.812 89.728,71.577 92.669,71.577
HO_A: D8.2 Q3.2 R16.1 R31.2 | length 16.4
  Top Layer w0.254: R16.1 63.592,30.029 63.592,32.181 64.747,33.335 71.96,33.335 72.509,32.787 Q3.2
  Top Layer w0.508: Q3.2@72.585,32.085 R31.2@75.028,32.085
HO_B: D14.2 Q4.2 R32.2 R33.1 | length 16.4
  Top Layer w0.254: R33.1 63.592,46.181 64.823,47.411 71.884,47.411 72.509,46.787 Q4.2 ; R32.2@74.952,46.106 R32.2
  Top Layer w0.508: Q4.2 R32.2@74.952,46.106
HO_C: D20.2 Q2.2 R30.2 R50.1 | length 16.1
  Top Layer w0.254: R50.1 63.592,58.029 63.592,60.181 64.823,61.411 71.884,61.411 72.509,60.787 Q2.2
  Top Layer w0.508: Q2.2@72.805,60.111 R30.2
IA+: D18.2 Q6.3 R17.2 R41.2 R45.1 R52.2 | length 47
  Top Layer w0.254: R17.2 v1(51.46,31.138) ; v1(53.518,31.146) 55.245,32.873 55.245,34.29 55.829,34.874 89.078,34.874 89.814,34.138 89.814,30.556 89.444,30.186 R52.2
  Bottom Layer w0.254: v1(51.46,31.138) v1@53.518,31.138
IB+: D19.2 Q7.3 R27.2 R42.2 R46.1 R53.2 | length 64.6
  Top Layer w0.254: v1(35.257,35.255) v1(35.257,35.255) R27.2 ; v1(53.467,36.474) 89.159,36.474 89.791,37.106 89.791,43.749 89.355,44.186 R53.2
  Bottom Layer w0.254: v1(35.257,35.255) 36.502,36.5 53.442,36.5 v1(53.467,36.474)
IC+: D16.2 Q5.3 R38.2 R43.1 R47.2 R51.2 | length 83.7
  Top Layer w0.254: v1(54.356,45.441) 54.356,48.463 55.412,49.52 88.205,49.52 89.791,51.106 89.791,57.749 89.355,58.186 R51.2
  Top Layer w0.508: R38.2 37.685,27.027 v1(37.694,27.036)
  Bottom Layer w0.254: v1(37.694,27.036) 38.288,26.441 53.01,26.441 54.356,27.788 v1(54.356,45.441)
INA+: C20.2 R14.1 R15.2 U4.3 | length 9
  Top Layer w0.508: U4.3 46.488,28.727 C20.2 R15.2 R14.1
INB+: R18.1 R19.2 U4.5 | length 6.4
  Top Layer w0.508: U4.5 45.822,31.267 47.507,29.582 49.169,29.582 R19.2@49.169,27.92
INB-: C30.2 R22.1 R23.2 U4.6 | length 17.1
  Top Layer w0.508: U4.6@44.651,32.537 44.628,32.537 43.764,33.401 43.764,38.43 44.552,39.218 49.378,39.218 C30.2@50.444,38.151 ; C30.2 50.569,37.914 R22.1
INC+: R28.1 R29.2 U4.10 | length 5.6
  Top Layer w0.508: R28.1 36.771,33.975 36.771,32.19 36.917,32.044 36.967,32.044 37.744,31.267 U4.10
INC-: C33.2 R35.1 R36.2 U4.9 | length 9
  Top Layer w0.508: R35.1 38.663,33.193 39.319,32.537 U4.9 ; R35.1@38.711,36.418 40.16,37.866 R36.2 42.055,37.866 C33.2 ; C33.2@42.055,37.853 C33.2@42.062,37.86
IND+: R39.1 R40.2 U4.12 | length 5.1
  Top Layer w0.508: R40.2 36.771,28.779 R39.1 36.805,28.727 U4.12
IND-: C42.2 R48.1 R49.2 U4.13 | length 8.1
  Top Layer w0.254: 38.728,23.557 38.794,23.492
  Top Layer w0.508: R48.1 38.728,23.557 ; C42.2 38.794,23.492 38.794,24.376 R49.2 38.8,27.116 39.141,27.457 U4.13
LED_PWM: D1.N U2.41 | length 9
  Top Layer w0.254: D1.N 34.123,49.286 35.015,50.178 U2.41
LO_A: D9.2 Q6.2 R20.1 R45.2 | length 32.7
  Top Layer w0.254: R20.1 63.592,25.407 63.594,25.405 63.594,24.925 65.761,22.758 73.584,22.758 74.678,23.853 74.678,26.122 v1(75.389,26.833) ; v1(79.504,26.858) 79.529,26.833 81.866,26.833 82.349,27.315 82.349,31.329 83.011,31.991 83.011,32.008 83.109,32.106 Q6.2
  Top Layer w0.508: Q6.2 R45.2@85.882,32.106
  Bottom Layer w0.254: v1(75.389,26.833) 75.402,26.845 79.491,26.845 v1(79.504,26.858)
LO_B: D15.2 Q7.2 R37.1 R46.2 | length 32.8
  Top Layer w0.254: R37.1 63.592,39.407 63.592,38.147 64.808,36.932 75.26,36.932 75.946,37.617 75.946,40.208 v1(76.632,40.894) ; v1(78.511,40.894) 78.577,40.828 81.866,40.828 82.384,41.346 82.384,45.363 Q7.2@83.011,45.991
  Top Layer w0.508: Q7.2 R46.2@85.882,46.106
  Bottom Layer w0.254: v1(76.632,40.894) v1(78.511,40.894)
LO_C: D21.2 Q5.2 R43.2 R54.1 | length 34.2
  Top Layer w0.254: R54.1 63.592,53.407 63.592,50.958 64.349,50.201 73.764,50.201 74.653,51.09 74.653,54.036 v1(75.44,54.824) ; v1(79.504,54.849) 79.529,54.824 81.866,54.824 82.396,55.354 82.396,59.376 Q5.2@83.011,59.991
  Top Layer w0.508: Q5.2 R43.2@85.882,60.106
  Bottom Layer w0.254: v1(75.44,54.824) 75.453,54.836 79.491,54.836 v1(79.504,54.849)
NetC7_1: C7.1 U3.1 | length 1.9
  Top Layer w0.762: U3.1 14.086,46.431 C7.1
NetC7_2: C7.2 L1.2 U3.6
NetC9_2: C9.2 C10.2 C11.2 D5.2 L1.1 R8.2 | length 3.5
  Top Layer w0.762: R8.2@12.577,50.215 C11.2 ; R8.2@12.596,50.196 12.922,49.871 C9.2
NetC11_1: C11.1 R8.1 R10.2 U3.3 | length 5.5
  Top Layer w0.762: U3.3 11.173,46.435 11.173,48.613 R10.2 11.173,48.621 11.173,50.261 R8.1 11.177,50.293 C11.1
NetC14_2: C14.2 R13.2 U2.17 | length 44.1
  Top Layer w0.254: v1(47.015,50.571) 47.015,49.073 47.401,48.687 48.517,48.687 U2.17 ; v1(48.463,53.061) 48.514,53.111 48.514,57.887 49.784,59.157 51.486,59.157 52.375,60.046 52.375,63.119 53.137,63.881 v1(54.762,63.881) ; v1(57.683,65.583) 60.314,68.213 v1(64.186,68.213) C14.2 66.356,69.139 70.46,69.139 71.704,67.894 R13.2
  Bottom Layer w0.254: v1(47.015,50.571) 47.015,51.558 48.463,53.006 v1(48.463,53.061) ; v1(54.762,63.881) 56.464,65.583 v1(57.683,65.583)
NetC19_1: C19.1 D6.N P2.1 S1.2
NetC21_2: C21.2 D7.1 U6.8 | length 3.6
  Top Layer w1.27: U6.8@59.899,29.324 D7.1@59.899,32.92
NetC26_1: C26.1 R24.1 | length 3
  Top Layer w0.508: C26.1 70.903,53.614 R24.1
NetC27_1: C27.1 R25.1 | length 3
  Top Layer w0.508: C27.1 R25.1
NetC28_1: C28.1 R26.1 | length 3
  Top Layer w0.508: C28.1 70.903,40.376 R26.1
NetC29_1: C29.1 R17.1 R18.2 | length 3.5
  Top Layer w0.508: C29.1 R17.1@48.979,31.431 ; R17.1 49.16,31.088 R17.1@49.306,30.942 ; R17.1@49.289,30.874 R18.2@50.483,29.68
NetC29_2: C29.2 R21.1 R22.2 | length 3.4
  Top Layer w0.508: C29.2 49.08,32.831 49.16,32.911 49.169,32.92 R22.2@49.169,34.568
NetC31_2: C31.2 D10.1 U7.8 | length 3.6
  Top Layer w1.27: U7.8@59.899,43.324 D10.1@59.899,46.92
NetC32_1: C32.1 R34.1 R35.2 | length 3.6
  Top Layer w0.254: C32.1 36.844,37.971 R34.1
  Top Layer w0.508: R34.1 38.655,37.858 R35.2
NetC32_2: C32.2 R27.1 R28.2 | length 8.3
  Top Layer w0.254: R27.1@35.229,37.828 R27.1 35.444,38.043 C32.2
  Top Layer w0.508: R27.1@35.229,37.828 34.376,37.828 33.68,37.132 33.68,34.595 34.292,33.984 R28.2
NetC34_1: C34.1 R41.1 | length 3
  Top Layer w0.508: C34.1 81.827,25.614 R41.1
NetC35_1: C35.1 R42.1 | length 3
  Top Layer w0.508: C35.1 81.827,39.614 R42.1
NetC36_1: C36.1 R47.1 | length 3
  Top Layer w0.508: C36.1 81.827,53.614 R47.1
NetC41_1: C41.1 R44.1 R48.2 | length 3.5
  Top Layer w0.762: C41.1 35.275,25.386 35.302,25.359 35.352,25.359 35.371,25.34 R44.1 35.371,23.566 R48.2
NetC41_2: C41.2 R38.1 R39.2 | length 3.5
  Top Layer w0.762: C41.2 35.129,26.786 35.302,26.958 35.352,26.958 35.371,26.977 R38.1 35.362,27.036 R39.2
NetC43_2: C43.2 D17.1 U9.8 | length 3.6
  Top Layer w0.254: U9.8@59.887,57.337 U9.8
  Top Layer w1.27: U9.8@59.887,57.337 D17.1
NetD1_A: D1.A R2.2 | length 2.6
  Top Layer w0.254: R2.2 32.323,46.723 32.601,46.723 33.481,45.843 33.883,45.843 D1.A
NetD2_A: D2.A R5.2 | length 6.1
  Top Layer w0.381: D2.A 30.037,45.604 30.247,45.395 30.247,45.345 31.396,44.196 34.087,44.196 35.001,43.282 R5.2@35.001,43.155
NetD3_A: D3.A R6.2 | length 2.1
  Top Layer w0.254: R6.2@27.906,45.604 R6.2
  Top Layer w0.508: D3.A R6.2@27.906,45.604
NetD4_A: D4.A R7.2 | length 2.2
  Top Layer w0.254: D4.A D4.A@21.754,45.568
  Top Layer w0.508: D4.A@21.754,45.568 R7.2@23.901,45.568
NetD8_1: D8.1 R16.2 U6.7 | length 4
  Top Layer w0.508: U6.7 61.661,28.042 R16.2 ; D8.1 62.02,30.029 62.024,30.025 62.024,29.933 62.192,29.765 R16.2@62.192,28.623
NetD9_1: D9.1 R20.2 U6.5 | length 3.5
  Top Layer w0.508: U6.5 60.397,25.502 60.491,25.407 D9.1@61.932,25.407 ; D9.1@62.024,25.411 62.024,25.502 62.192,25.671 R20.2@62.192,26.804
NetD14_1: D14.1 R33.2 U7.7 | length 4
  Top Layer w0.508: U7.7 61.661,42.042 R33.2 ; D14.1 62.02,44.029 62.024,44.025 62.024,43.933 62.192,43.765 R33.2@62.192,42.623
NetD15_1: D15.1 R37.2 U7.5 | length 3.5
  Top Layer w0.508: U7.5 60.397,39.502 60.491,39.407 D15.1@61.932,39.407 ; D15.1@62.024,39.411 62.024,39.502 62.192,39.671 R37.2@62.192,40.804
NetD20_1: D20.1 R50.2 U9.7 | length 4
  Top Layer w0.508: U9.7 61.661,56.042 R50.2 ; D20.1 62.02,58.029 62.024,58.025 62.024,57.933 62.192,57.765 R50.2@62.192,56.623
NetD21_1: D21.1 R54.2 U9.5 | length 3.5
  Top Layer w0.508: U9.5 60.397,53.502 60.491,53.407 D21.1@61.932,53.407 ; D21.1@62.024,53.411 62.024,53.502 62.192,53.671 R54.2@62.192,54.804
NetIPS1_11: IPS1.11 R9.2 | length 23.5
  Top Layer w0.254: v1(27.838,61.443) 42.327,61.443 R9.2
  Bottom Layer w0.254: IPS1.11 22.501,65.508 26.694,65.508 27.838,64.364 v1(27.838,61.443)
NetQ1_1: Q1.1 R11.2 R12.1 | length 3.5
  Top Layer w0.508: Q1.1 47.706,60.24 48.085,60.62 R12.1 ; R12.1@49.027,60.62 R11.2
NetQ1_3: Q1.3 R9.1 | length 1.9
  Top Layer w0.254: R9.1 43.854,61.52 44.127,61.247 44.212,61.247 44.275,61.183 45.092,61.183 45.315,60.96 Q1.3@45.431,60.96
OSCIN: C6.1 U2.5 X1.1 | length 7.9
  Top Layer w0.254: C6.1 41.464,40.753 X1.1 41.693,40.623 42.723,41.652 42.723,43.205 43.725,44.208 U2.5
OSCOUT: C8.1 U2.6 X1.3 | length 5.2
  Top Layer w0.254: U2.6 44.225,42.805 X1.3 44.034,42.133 C8.1
OUTB: C30.1 R23.1 U2.14 U4.7 | length 20.7
  Top Layer w0.254: U2.14 48.534,47.17 49.528,47.17 50.046,46.652 50.046,45.042 v1(49.479,44.475)
  Top Layer w0.508: U4.7 45.147,37.044 46.025,37.922 v1(47.904,37.922) 49.135,37.922 C30.1@49.147,37.935 ; R23.1 C30.1
  Bottom Layer w0.254: v1(47.904,37.922) 48.438,38.456 48.438,43.434 v1(49.479,44.475)
OUTC: C33.1 R36.1 U2.15 U4.8 | length 24.5
  Top Layer w0.254: U2.15 49.806,47.678 50.089,47.396 50.749,46.736 50.749,44.532 50.409,44.191 49.652,43.434 v1(49.555,43.434)
  Top Layer w0.508: U4.8 40.359,33.807 40.363,33.811 R36.1 40.366,36.469 42.109,36.469 42.258,36.619 42.408,36.619 42.975,37.186 v1(43.002,37.186)
  Bottom Layer w0.254: v1(43.002,37.186) 48.514,37.186 49.53,38.202 49.53,43.409 v1(49.555,43.434)
OUTD: C42.1 R49.1 U2.16 U4.14 | length 44.3
  Top Layer w0.254: C42.1 41.187,21.615 50.648,21.615 52.273,23.241 52.273,39.141 v1(51.562,39.853) ; U2.16 50.272,48.178 51.587,46.863 v1(51.587,43.688)
  Top Layer w0.508: U4.14 40.201,26.133 R49.1 40.201,22.615 C42.1
  Bottom Layer w0.254: v1(51.562,39.853) 51.575,39.865 51.575,43.675 v1(51.587,43.688)
PA9_TX: P1.5 U2.30 | length 17.3
  Top Layer w0.254: v1(44.247,56.286) 44.247,56.274 44.725,55.795 U2.30
  Bottom Layer w0.254: v1(44.247,56.286) 44.247,60.554 P1.5
PA10_RX: P1.3 U2.31 | length 16.5
  Top Layer w0.254: v1(43.612,55.601) 44.225,54.987 U2.31
  Bottom Layer w0.254: v1(43.612,55.601) 43.586,55.626 43.586,62.432 P1.3
PWM_A: U2.10 U6.2 | length 23.1
  Top Layer w0.254: U2.10 46.225,43.64 48.59,41.275 52.045,41.275 52.832,40.488 52.832,29.134 53.924,28.042 U6.2
PWM_B: U2.11 U7.2 | length 10
  Top Layer w0.254: U2.11 46.725,43.876 48.56,42.042 U7.2
PWM_C: U2.12 U9.2 | length 21.4
  Top Layer w0.254: U2.12 47.225,44.265 48.819,42.672 51.664,42.672 52.68,43.688 52.68,55.499 53.222,56.042 U9.2
RESET: C1.1 R3.2 SW1.2 U2.7 | length 41.2
  Top Layer w0.254: U2.7 44.725,50.466 v1(45.466,51.206) ; v1(47.86,55.423) 47.879,55.441 47.879,58.852 48.895,59.868 51.359,59.868 51.638,60.147 51.638,64.313 52.273,64.948 v1(54.762,64.948) ; v1(57.683,66.675) 57.683,69.088 58.522,69.926 SW1.2 ; v1(60.173,66.65) 60.198,66.624 61.598,66.624 ; R3.2@61.606,65.667 C1.1
  Bottom Layer w0.254: v1(45.466,51.206) 47.86,53.601 v1(47.86,55.423) ; v1(54.762,64.948) 56.109,66.294 57.302,66.294 v1(57.683,66.675) 60.147,66.675 v1(60.173,66.65)
RST_IPS: IPS1.6 U2.27 | length 29.7
  Top Layer w0.254: v1(24.536,62.078) 27.508,59.106 44.526,59.106 46.225,57.407 U2.27
  Bottom Layer w0.254: IPS1.6 22.43,62.079 24.535,62.079 v1(24.536,62.078)
SCL: U1.2 U2.21 | length 47.7
  Top Layer w0.254: U2.21 48.534,50.687 49.317,50.687 49.328,50.698 50.266,50.698 52.197,52.629 52.197,56.896 54.762,59.461 v1(54.762,60.681) ; v1(57.658,62.467) 58.158,62.967 83.16,62.967 84.14,63.947 U1.2
  Bottom Layer w0.254: v1(54.762,60.681) 56.549,62.467 v1(57.658,62.467)
SDA: U1.3 U2.22 | length 46
  Top Layer w0.254: U2.22 48.534,51.187 49.943,51.187 51.689,52.934 51.689,57.379 53.95,59.639 53.95,60.964 54.732,61.746 v1@54.762,61.746 ; v1(57.658,63.602) 81.966,63.602 82.89,64.526 U1.3
  Bottom Layer w0.254: v1(54.762,61.747) 56.617,63.602 v1(57.658,63.602)
SPI1_MOSI: IPS1.3 U2.28 | length 27.9
  Top Layer w0.254: v1(28.397,58.141) 44.399,58.141 45.725,56.814 U2.28
  Bottom Layer w0.254: IPS1.3 24.347,59.981 26.187,58.141 v1(28.397,58.141)
SPI1_NSS: IPS1.7 U2.25 | length 31.7
  Top Layer w0.254: v1(25.112,62.781) 27.466,60.427 45.466,60.427 47.225,58.667 U2.25
  Bottom Layer w0.254: IPS1.7 v1(25.112,62.781)
SPI1_SCK: IPS1.4 U2.26 | length 29.9
  Top Layer w0.254: v1(28.169,59.792) 44.933,59.792 46.725,57.999 U2.26
  Bottom Layer w0.254: IPS1.4 24.867,60.681 25.756,59.792 v1(28.169,59.792)
SWCLK: P1.6 U2.37 | length 38.9
  Top Layer w0.254: v1(39.624,56.261) 36.551,56.261 35.839,55.55 35.839,51.867 36.474,51.232 37.871,51.232 38.818,52.178 U2.37
  Bottom Layer w0.254: v1(39.624,56.261) 40.31,56.947 40.31,69.367 42.487,71.544 49.919,71.544 P1.6
SWIO: P1.4 U2.34 | length 22
  Top Layer w0.254: v1(42.139,56.49) 42.139,55.316 42.725,54.729 U2.34
  Bottom Layer w0.254: v1(42.139,56.49) 42.139,67.437 43.651,68.949 47.562,68.949 P1.4
pads on no net: H1.11 H2.11 IPS1.1 IPS1.2 IPS1.9 P1.7 P1.8 S1.3 U1.5 U1.6 U2.2 U2.3 U2.4 U2.13 U2.18 U2.19 U2.32 U2.33 U2.38 U2.39 U2.40 U2.42 U2.43 U2.45 U2.46

## Polygon pours and split planes (outlines as drawn)
IB+ on Top Layer "NONET_L-01_P-001" (solid, pour order 0): 82.831,37.12 83.009,36.942 88.877,36.942 89.207,37.272 89.207,45.07 89.088,45.188 82.924,45.188 82.831,45.095
IC+ on Top Layer "NONET_L-01_P-001" (solid, pour order 3): 82.831,51.12 83.009,50.942 88.877,50.942 89.207,51.272 89.207,59.07 89.088,59.188 82.924,59.188 82.831,59.095
IA+ on Top Layer "NONET_L-01_P-001" (solid, pour order 4): 82.831,23.12 83.009,22.942 88.877,22.942 89.207,23.272 89.207,31.07 89.088,31.188 82.924,31.188 82.831,31.095
GND on Top Layer "NONET_L-01_P-001" (solid, pour order 7): 20.975,51.866 34.056,51.866 34.137,51.947 34.137,53.614 34.043,53.708 20.963,53.708 20.874,53.619 20.874,51.968
GND on Top Layer "NONET_L-01_P-001" (solid, pour order 9): 20.98,42.837 33.921,42.837 33.985,42.901 33.985,43.713 33.964,43.735 29.468,43.735 29.21,43.993 29.21,44.475 29.007,44.679 20.968,44.679 20.879,44.589 20.879,42.938
GND on Top Layer "NONET_L-01_P-001" (solid, pour order 10): 11.836,47.707 12.141,48.012 12.141,49.073 12.268,49.2 16.434,49.2 16.485,49.149 16.485,47.574 16.358,47.447 12.675,47.447 12.421,47.193 12.421,45.822 12.37,45.771 11.887,45.771 11.836,45.822
NetC9_2 on Top Layer "NONET_L-01_P-001" (solid, pour order 11): 16.84,49.21 16.599,49.451 12.804,49.451 12.268,49.987 12.548,50.267 19.101,50.267 19.329,50.038 19.329,45.618 19.228,45.517 16.891,45.517 16.84,45.568
NetC7_2 on Top Layer "NONET_L-01_P-001" (solid, pour order 12): 12.852,41.808 19.329,41.808 19.38,41.859 19.38,44.729 19.253,44.856 12.852,44.856 12.802,44.806 12.802,41.859
NetC9_2 on Top Layer "NONET_L-01_P-001" (solid, pour order 13): 12.192,51.46 12.192,53.137 12.471,53.416 15.367,53.416 15.596,53.188 15.596,50.546 15.977,50.165 15.682,49.871 12.922,49.871
GND on Top Layer "NONET_L-01_P-001" (solid, pour order 14): 90.856,61.874 88.773,63.957 88.773,71.857 89.103,72.187 97.636,72.187 cw(c97.636,71.17) 98.654,71.17 98.654,21.947 cw(c97.636,21.947) 97.636,20.93 91.542,20.93 90.856,21.615
B on Top Layer "NONET_L-01_P-001" (solid, pour order 22): 72.085,45.211 71.958,45.211 71.958,45.161 71.958,42.062 72.085,41.935 76.987,41.935 77.241,41.681 77.673,41.681 78.384,42.393 78.384,45.211
A on Top Layer "NONET_L-01_P-001" (solid, pour order 23): 72.085,31.211 71.958,31.211 71.958,31.161 71.958,28.062 72.085,27.935 76.987,27.935 77.241,27.681 77.673,27.681 78.384,28.393 78.384,31.211
C on Top Layer "NONET_L-01_P-001" (solid, pour order 24): 72.085,59.211 71.958,59.211 71.958,59.161 71.958,56.062 72.085,55.935 76.987,55.935 77.241,55.681 77.673,55.681 78.384,56.393 78.384,59.211
B on Top Layer "NONET_L-01_P-001" (solid, pour order 27): 77.884,46.126 77.884,45.916 78.003,45.796 78.003,45.314 77.876,45.187 78.08,44.983 78.283,44.983 78.283,45.294 78.611,45.623 78.232,46.002 78.232,46.05
A on Top Layer "NONET_L-01_P-001" (solid, pour order 28): 77.884,32.126 77.884,31.916 78.003,31.796 78.003,31.314 77.876,31.187 78.08,30.983 78.283,30.983 78.283,31.294 78.611,31.623 78.232,32.002 78.232,32.05
C on Top Layer "NONET_L-01_P-001" (solid, pour order 29): 77.884,60.126 77.884,59.916 78.003,59.796 78.003,59.314 77.876,59.187 78.08,58.983 78.283,58.983 78.283,59.294 78.611,59.623 78.232,60.002 78.232,60.05
NetC19_1 on Top Layer "NONET_L-01_P-001" (solid, pour order 34): 10.39,20.93 28.016,20.93 29.083,21.996 29.083,31.521 28.702,31.902 10.414,31.902 9.373,30.861 9.373,21.947 ccw(c10.39,21.947)
GND on Top Layer "NONET_L-01_P-001" (solid, pour order 35): 10.871,33.02 28.448,33.02 28.981,33.553 28.981,37.541 28.499,38.024 11.557,38.024 10.617,37.084
GND on Top Layer "NONET_L-01_P-001" (solid, pour order 37): 15.795,33.837 11.185,38.446 11.185,42.739 10.943,42.981 10.537,42.981 10.389,43.129 10.389,44.475 10.693,44.78 12.217,44.78 12.421,44.983 12.421,45.822 11.836,45.822 11.659,45.644 9.576,45.644 9.373,45.441 9.373,33.884 10.236,33.02 13.501,33.02
5V on Top Layer "NONET_L-01_P-001" (solid, pour order 38): 56.388,68.682 55.372,67.666 55.372,65.684 56.388,64.668
5V on Top Layer "NONET_L-01_P-001" (solid, pour order 39): 54.686,66.192 56.109,67.615 56.388,67.615 56.388,66.243 56.083,65.938
12V on Bottom Layer "NONET_L-01_P-001" (solid, pour order 5): 28.727,20.93 70.917,20.93 71.831,21.844 71.831,60.63 71.501,60.96 66.421,60.96 66.167,60.706 66.167,25.908 64.846,24.587 37.033,24.587 36.525,25.095 36.525,26.264 36.22,26.568 28.524,26.568 28.016,26.06 28.016,21.641 ccw(c28.727,21.641)
GND on Bottom Layer "NONET_L-01_P-001" (solid, pour order 16): 10.39,20.93 27.254,20.93 27.407,21.082 27.407,28.346 28.143,29.083 34.9,29.083 35.535,28.448 50.241,28.448 50.571,28.778 50.571,34.29 50.241,34.62 9.373,34.62 9.373,21.947 ccw(c10.39,21.947)
GND on Bottom Layer "NONET_L-01_P-001" (solid, pour order 17): 36.202,33.292 34.62,34.874 34.62,37.465 34.95,37.795 46.736,37.795 47.777,38.837 47.777,44.374 49.327,45.923 56.566,45.923 57.531,44.958 57.531,26.746 57.048,26.264 55.296,26.264 55.016,25.984 55.016,25.298 55.448,24.867 64.643,24.867 65.862,26.086 65.862,72.187 10.389,72.187 ccw(c10.389,71.171) 9.373,71.171 9.373,33.61
B on Bottom Layer "NONET_L-01_P-001" (solid, pour order 19): 78.232,46.05 78.232,42.316 78.486,42.062 98.654,42.062 98.654,46.355 78.537,46.355
A on Bottom Layer "NONET_L-01_P-001" (solid, pour order 20): 78.537,28.067 91.872,28.067 92.202,28.397 92.202,37.084 92.507,37.389 98.171,37.389 98.654,37.871 98.654,41.478 98.247,41.885 89.027,41.885 88.773,41.631 88.773,32.766 88.341,32.334 78.537,32.334 78.232,32.029 78.232,28.372
C on Bottom Layer "NONET_L-01_P-001" (solid, pour order 30): 78.537,60.325 91.872,60.325 92.202,59.995 92.202,51.156 92.735,50.622 98.261,50.622 98.654,50.229 98.654,46.888 98.273,46.507 89.027,46.507 88.773,46.761 88.773,55.626 88.341,56.058 78.537,56.058 78.232,56.363 78.232,60.02
GND on Bottom Layer "NONET_L-01_P-001" (solid, pour order 32): 65.761,60.909 66.167,61.316 71.78,61.316 72.314,60.782 72.314,21.006 72.39,20.93 97.636,20.93 ccw(c97.636,21.947) 98.654,21.947 98.654,36.678 98.298,37.033 93.015,37.033 92.608,36.627 92.608,28.016 92.024,27.432 77.923,27.432 77.673,27.681 77.673,32.131 78.461,32.918 87.605,32.918 88.24,33.553 88.24,41.199 87.681,41.758 78.156,41.758 77.749,42.164 77.749,46.482 78.283,47.015 87.757,47.015 88.316,47.574 88.316,55.093 87.808,55.601 78.465,55.601 77.927,56.139 77.927,60.198 78.461,60.731 91.973,60.731 92.558,60.147 92.558,51.333 93.015,50.876 98.349,50.876 98.654,51.181 98.654,71.17 ccw(c97.636,71.17) 97.636,72.187 65.862,72.187
GND on Bottom Layer "NONET_L-01_P-001" (solid, pour order 36): 54.661,25.273 55.067,25.679 56.159,25.679
no net on Top Solder "NONET_L-01_P-001" (solid): 74.242,29.566 75.667,29.566 75.667,27.932 75.667,27.931 74.242,27.931
no net on Top Solder "NONET_L-01_P-001" (solid): 74.242,43.566 75.667,43.566 75.667,41.932 75.667,41.931 74.242,41.931
no net on Top Solder "NONET_L-01_P-001" (solid): 74.242,57.566 75.667,57.566 75.667,55.932 75.667,55.931 74.242,55.931

## Other copper
Top Layer:
  pour cut-out: 92.735,50.597 93.167,51.029 98.146,51.029 98.654,51.537 98.654,36.678 98.298,37.033 93.294,37.033 92.735,37.592
Bottom Layer:
  pour cut-out: 58.166,67.012 53.289,67.012 53.289,61.036 53.696,60.63 57.76,60.63 58.166,61.036
  pour cut-out: 58.166,65.42 59.116,66.37 58.395,66.37 58.166,66.599

## Silkscreen, mask and mechanical layers (free items; w line width, h text height)
Top Overlay:
  lines w0.254: 44.909,64.465 57.758,64.465 ; 47.57,63.043 47.57,65.788 ; 50.084,63.017 50.084,65.814 ; 52.421,63.017 52.421,65.788 ; 55.143,63.043 55.143,65.862 ; 44.909,63.017 57.758,63.017 57.758,65.862 44.909,65.862 44.909,63.017
  text "GND" at 45.42,64.927 h0.91
  text "DIO" at 48.076,64.928 h0.91
  text "CLK" at 50.408,64.928 h0.91
  text "3.3V" at 52.984,64.935 h0.91
  text "5.0V" at 55.637,64.935 h0.91
  text "GND" at 79.217,64.654 h1.02
  text "SDA" at 81.496,64.654 h1.02
  text "SCL" at 83.755,64.655 h1.02
  text "5V" at 86.258,64.654 h1.02
  text "RES" at 61.505,63.586 h0.91
  text "RX1" at 48.068,63.388 h0.91
  text "TX1" at 50.546,63.388 h0.91
  text "3.3V" at 52.871,63.387 h0.91
  text "5.0V" at 55.637,63.387 h0.91
  text "GND" at 45.42,63.379 h0.91
  text "Foc-Learning-Board By:LPBOSS" at 52.445,21.412 h1.52
Top Solder:
  lines w0.254: 93.777,27.522 93.777,30.926 93.777,36.107 ; 93.777,52.095 93.777,64.872 ; 94.634,27.522 94.634,30.926 94.634,36.107 ; 94.634,52.095 94.634,64.872 ; 95.491,27.522 95.491,30.926 95.491,36.107 ; 95.491,52.095 95.491,64.872 ; 96.349,27.522 96.349,30.926 96.349,36.107 ; 96.349,52.095 96.349,64.872 ; 97.206,27.522 97.206,30.926 97.206,36.107 ; 97.206,52.095 97.206,64.872
Mechanical 1:
  lines w0.254: 10.39,72.085 97.638,72.085 cw(c97.638,71.068) 98.655,71.068 ; 10.39,72.086 ccw(c10.39,71.069) 9.373,71.069 9.373,22.226 ccw(c10.39,22.226) 10.39,21.209 97.636,21.209 ccw(c97.636,22.226) 98.654,22.226 98.654,71.068

## Text inside footprints (layer, text, board x,y; h text height)
P2: Top Overlay "+" at 19.001,28.096 h1.52 r90; Top Overlay "-" at 19.118,35.315 h1.52 r90